# Altium PCB MK2.PcbDoc (part 6 of 7)
Units mil, origin at the board's own origin, x right, y up, seen from the top; angles counter-clockwise.
Board outline 3950 x 3965 mil, 2 copper layers (Top Layer, Bottom Layer); 19 components, 37 nets, 113 pads, 8 vias.
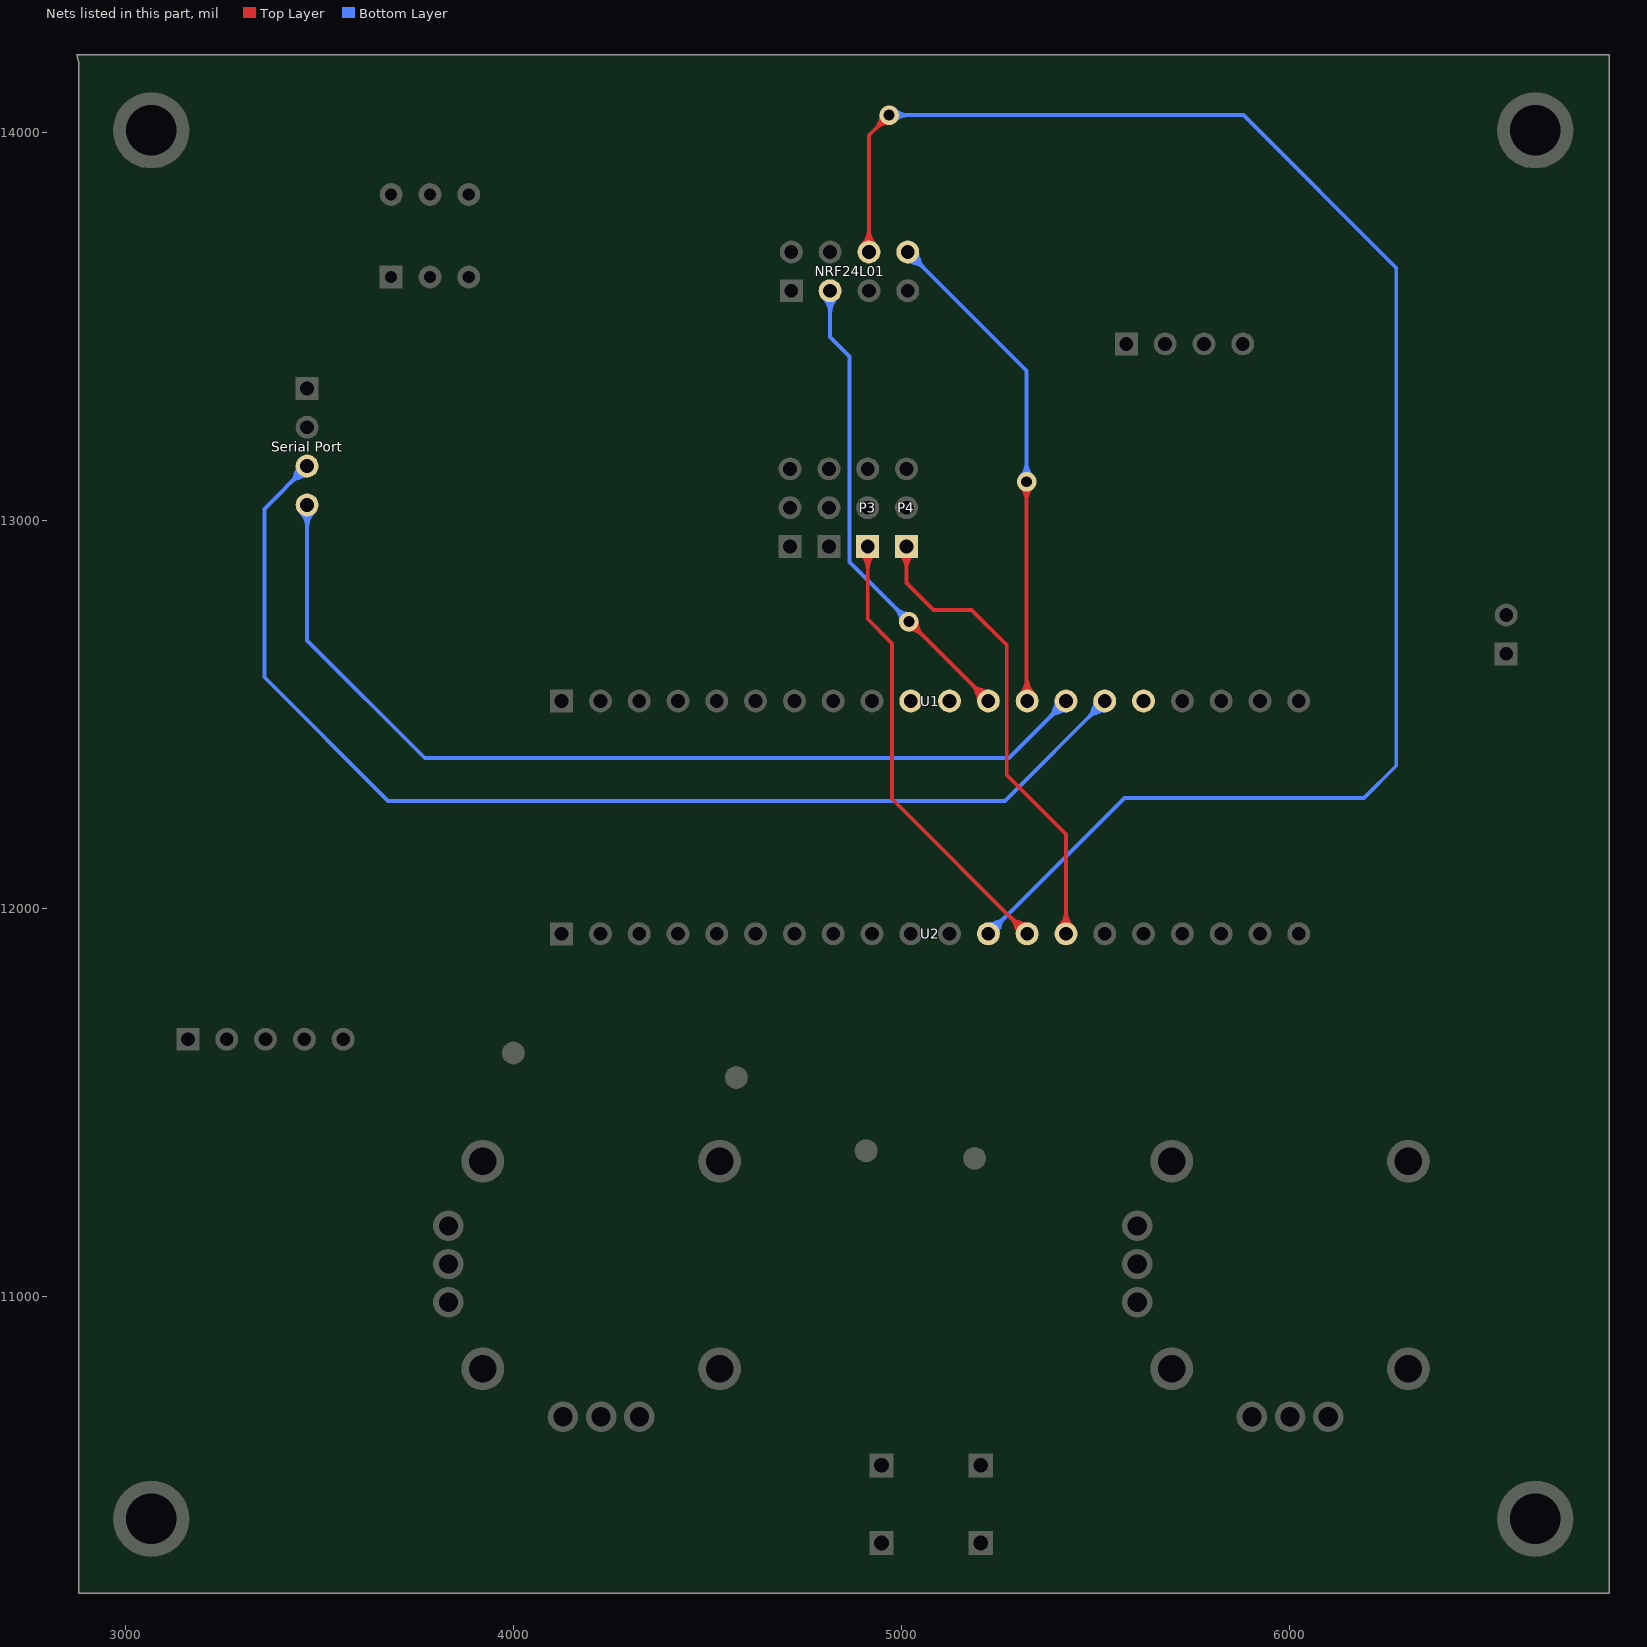
[diagram p6: the nets of this part, all layers, seen from the top]

## Via types
v1: diameter 50, hole 28, Top Layer to Bottom Layer, 8 vias

## Nets (pads, with @x,y where several pads share a name; then routed paths per layer and width w, separated by ;. In a path a pad name is that pad's centre, name@x,y a point inside that pad or via, vN(x,y) a via of type N, cw(c..) or ccw(c..) an arc to the next point about the centre after c; other vN are vias at no path point) (continued)
PA7: NRF24L01.6 U2.12 | length 9483.3
  Top Layer w10: NRF24L01.6@4916.57,13691.93 4916.57,13992.72 v1(4968.54,14044.69) ; NRF24L01.6@4899.23,13709.27 ccw(c4857.36,13751.14) 4916.57,13751.14 ; NRF24L01.6@4899.23,13709.27 ccw(c4857.36,13751.14) 4916.57,13751.14 ; NRF24L01.6@4899.23,13709.27 ccw(c4857.36,13751.14) 4916.57,13751.14 ; NRF24L01.6@4899.23,13709.27 ccw(c4857.36,13751.14) 4916.57,13751.14 ; NRF24L01.6@4899.23,13709.27 ccw(c4857.36,13751.14) 4916.57,13751.14 ; NRF24L01.6@4899.23,13709.27 ccw(c4857.36,13751.14) 4916.57,13751.14 ; NRF24L01.6@4906.3,13702.2 ccw(c4881.5,13727) 4916.57,13727 ; NRF24L01.6@4906.3,13702.2 ccw(c4881.5,13727) 4916.57,13727 ; NRF24L01.6@4906.3,13702.2 ccw(c4881.5,13727) 4916.57,13727 ; NRF24L01.6@4906.3,13702.2 ccw(c4881.5,13727) 4916.57,13727 ; NRF24L01.6@4906.3,13702.2 ccw(c4881.5,13727) 4916.57,13727 ; NRF24L01.6@4906.3,13702.2 ccw(c4881.5,13727) 4916.57,13727 ; 4916.57,13727 ccw(c4951.65,13727) NRF24L01.6@4926.85,13702.2 ; 4916.57,13727 ccw(c4951.65,13727) NRF24L01.6@4926.85,13702.2 ; 4916.57,13727 ccw(c4951.65,13727) NRF24L01.6@4926.85,13702.2 ; 4916.57,13727 ccw(c4951.65,13727) NRF24L01.6@4926.85,13702.2 ; 4916.57,13727 ccw(c4951.65,13727) NRF24L01.6@4926.85,13702.2 ; 4916.57,13727 ccw(c4951.65,13727) NRF24L01.6@4926.85,13702.2 ; 4916.57,13751.14 ccw(c4975.79,13751.14) NRF24L01.6@4933.92,13709.27 ; 4916.57,13751.14 ccw(c4975.79,13751.14) NRF24L01.6@4933.92,13709.27 ; 4916.57,13751.14 ccw(c4975.79,13751.14) NRF24L01.6@4933.92,13709.27 ; 4916.57,13751.14 ccw(c4975.79,13751.14) NRF24L01.6@4933.92,13709.27 ; 4916.57,13751.14 ccw(c4975.79,13751.14) NRF24L01.6@4933.92,13709.27 ; 4916.57,13751.14 ccw(c4975.79,13751.14) NRF24L01.6@4933.92,13709.27 ; 4934.4,14010.54 cw(c4968.54,13976.4) v1@4968.54,14024.69 ; 4934.4,14010.54 ccw(c4900.26,14044.69) v1@4948.54,14044.69 ; 4934.4,14010.54 ccw(c4900.26,14044.69) v1@4948.54,14044.69 ; 4934.4,14010.54 cw(c4968.54,13976.4) v1@4968.54,14024.69 ; 4934.4,14010.54 ccw(c4900.26,14044.69) v1@4948.54,14044.69 ; 4934.4,14010.54 cw(c4968.54,13976.4) v1@4968.54,14024.69 ; 4934.4,14010.54 ccw(c4900.26,14044.69) v1@4948.54,14044.69 ; 4934.4,14010.54 cw(c4968.54,13976.4) v1@4968.54,14024.69 ; 4934.4,14010.54 ccw(c4900.26,14044.69) v1@4948.54,14044.69 ; 4934.4,14010.54 cw(c4968.54,13976.4) v1@4968.54,14024.69 ; 4934.4,14010.54 ccw(c4900.26,14044.69) v1@4948.54,14044.69 ; 4934.4,14010.54 cw(c4968.54,13976.4) v1@4968.54,14024.69 ; 4941.79,14019.49 cw(c4975.56,14010.44) v1(4968.54,14044.69) ; 4941.79,14019.49 cw(c4975.56,14010.44) v1(4968.54,14044.69) ; 4941.79,14019.49 cw(c4975.56,14010.44) v1(4968.54,14044.69) ; 4941.79,14019.49 cw(c4975.56,14010.44) v1(4968.54,14044.69) ; 4941.79,14019.49 cw(c4975.56,14010.44) v1(4968.54,14044.69) ; 4941.79,14019.49 cw(c4975.56,14010.44) v1(4968.54,14044.69) ; 4941.79,14019.49 cw(c4975.56,14010.44) v1(4968.54,14044.69) ; 4941.79,14019.49 cw(c4975.56,14010.44) v1(4968.54,14044.69) ; 4941.79,14019.49 cw(c4975.56,14010.44) v1(4968.54,14044.69) ; 4941.79,14019.49 cw(c4975.56,14010.44) v1(4968.54,14044.69) ; 4941.79,14019.49 cw(c4975.56,14010.44) v1(4968.54,14044.69) ; 4941.79,14019.49 cw(c4975.56,14010.44) v1(4968.54,14044.69) ; 4941.79,14019.49 cw(c4975.56,14010.44) v1(4968.54,14044.69) ; 4941.79,14019.49 cw(c4975.56,14010.44) v1(4968.54,14044.69) ; 4941.79,14019.49 cw(c4975.56,14010.44) v1(4968.54,14044.69) ; 4943.35,14017.93 ccw(c4934.3,14051.7) v1(4968.54,14044.69) ; 4943.35,14017.93 ccw(c4934.3,14051.7) v1(4968.54,14044.69) ; 4943.35,14017.93 ccw(c4934.3,14051.7) v1(4968.54,14044.69) ; 4943.35,14017.93 ccw(c4934.3,14051.7) v1(4968.54,14044.69) ; 4943.35,14017.93 ccw(c4934.3,14051.7) v1(4968.54,14044.69) ; 4943.35,14017.93 ccw(c4934.3,14051.7) v1(4968.54,14044.69) ; 4943.35,14017.93 ccw(c4934.3,14051.7) v1(4968.54,14044.69) ; 4943.35,14017.93 ccw(c4934.3,14051.7) v1(4968.54,14044.69) ; 4943.35,14017.93 ccw(c4934.3,14051.7) v1(4968.54,14044.69) ; 4943.35,14017.93 ccw(c4934.3,14051.7) v1(4968.54,14044.69) ; 4943.35,14017.93 ccw(c4934.3,14051.7) v1(4968.54,14044.69) ; 4943.35,14017.93 ccw(c4934.3,14051.7) v1(4968.54,14044.69) ; 4943.35,14017.93 ccw(c4934.3,14051.7) v1(4968.54,14044.69) ; 4943.35,14017.93 ccw(c4934.3,14051.7) v1(4968.54,14044.69) ; 4943.35,14017.93 ccw(c4934.3,14051.7) v1(4968.54,14044.69)
  Bottom Layer w10: v1(4968.54,14044.69) 5881.93,14044.69 6275.63,13650.98 6275.63,12367.52 6192.95,12284.84 5574.84,12284.84 U2.12@5224.45,11934.45 ; v1@4982.69,14030.54 cw(c5016.83,13996.4) 5016.83,14044.69 ; v1@4982.69,14030.54 cw(c5016.83,13996.4) 5016.83,14044.69 ; v1@4982.69,14030.54 cw(c5016.83,13996.4) 5016.83,14044.69 ; v1@4982.69,14030.54 cw(c5016.83,13996.4) 5016.83,14044.69 ; v1@4982.69,14030.54 cw(c5016.83,13996.4) 5016.83,14044.69 ; v1@4982.69,14030.54 cw(c5016.83,13996.4) 5016.83,14044.69 ; v1@4982.69,14058.83 ccw(c5016.83,14092.97) 5016.83,14044.69 ; v1@4982.69,14058.83 ccw(c5016.83,14092.97) 5016.83,14044.69 ; v1@4982.69,14058.83 ccw(c5016.83,14092.97) 5016.83,14044.69 ; v1@4982.69,14058.83 ccw(c5016.83,14092.97) 5016.83,14044.69 ; v1@4982.69,14058.83 ccw(c5016.83,14092.97) 5016.83,14044.69 ; v1@4982.69,14058.83 ccw(c5016.83,14092.97) 5016.83,14044.69 ; U2.12@5219.09,11935.55 cw(c5256.74,11927.84) 5246.8,11964.96 ; U2.12@5219.09,11935.55 cw(c5256.74,11927.84) 5246.8,11964.96 ; U2.12@5219.09,11935.55 cw(c5256.74,11927.84) 5246.8,11964.96 ; U2.12@5219.09,11935.55 cw(c5256.74,11927.84) 5246.8,11964.96 ; U2.12@5219.09,11935.55 cw(c5256.74,11927.84) 5246.8,11964.96 ; U2.12@5219.09,11935.55 cw(c5256.74,11927.84) 5246.8,11964.96 ; U2.12@5219.09,11935.55 cw(c5256.74,11927.84) 5246.8,11964.96 ; U2.12@5219.09,11935.55 cw(c5256.74,11927.84) 5246.8,11964.96 ; U2.12@5219.09,11935.55 cw(c5256.74,11927.84) 5246.8,11964.96 ; U2.12@5219.09,11935.55 cw(c5256.74,11927.84) 5246.8,11964.96 ; U2.12@5219.09,11935.55 cw(c5256.74,11927.84) 5246.8,11964.96 ; U2.12@5219.09,11935.55 cw(c5256.74,11927.84) 5246.8,11964.96 ; U2.12@5219.09,11935.55 cw(c5256.74,11927.84) 5246.8,11964.96 ; U2.12@5219.09,11935.55 cw(c5256.74,11927.84) 5246.8,11964.96 ; U2.12@5219.09,11935.55 cw(c5256.74,11927.84) 5246.8,11964.96 ; U2.12@5224.45,11948.98 ccw(c5224.45,11984.05) 5249.25,11959.25 ; U2.12@5224.45,11948.98 ccw(c5224.45,11984.05) 5249.25,11959.25 ; U2.12@5224.45,11948.98 ccw(c5224.45,11984.05) 5249.25,11959.25 ; U2.12@5224.45,11948.98 ccw(c5224.45,11984.05) 5249.25,11959.25 ; U2.12@5224.45,11948.98 ccw(c5224.45,11984.05) 5249.25,11959.25 ; U2.12@5224.45,11948.98 ccw(c5224.45,11984.05) 5249.25,11959.25 ; U2.12@5224.45,11958.98 ccw(c5224.45,12018.19) 5266.32,11976.32 ; U2.12@5224.45,11958.98 ccw(c5224.45,12018.19) 5266.32,11976.32 ; U2.12@5224.45,11958.98 ccw(c5224.45,12018.19) 5266.32,11976.32 ; U2.12@5224.45,11958.98 ccw(c5224.45,12018.19) 5266.32,11976.32 ; U2.12@5224.45,11958.98 ccw(c5224.45,12018.19) 5266.32,11976.32 ; U2.12@5224.45,11958.98 ccw(c5224.45,12018.19) 5266.32,11976.32 ; U2.12@5225.55,11929.09 ccw(c5217.84,11966.75) 5254.96,11956.8 ; U2.12@5225.55,11929.09 ccw(c5217.84,11966.75) 5254.96,11956.8 ; U2.12@5225.55,11929.09 ccw(c5217.84,11966.75) 5254.96,11956.8 ; U2.12@5225.55,11929.09 ccw(c5217.84,11966.75) 5254.96,11956.8 ; U2.12@5225.55,11929.09 ccw(c5217.84,11966.75) 5254.96,11956.8 ; U2.12@5225.55,11929.09 ccw(c5217.84,11966.75) 5254.96,11956.8 ; U2.12@5225.55,11929.09 ccw(c5217.84,11966.75) 5254.96,11956.8 ; U2.12@5225.55,11929.09 ccw(c5217.84,11966.75) 5254.96,11956.8 ; U2.12@5225.55,11929.09 ccw(c5217.84,11966.75) 5254.96,11956.8 ; U2.12@5225.55,11929.09 ccw(c5217.84,11966.75) 5254.96,11956.8 ; U2.12@5225.55,11929.09 ccw(c5217.84,11966.75) 5254.96,11956.8 ; U2.12@5225.55,11929.09 ccw(c5217.84,11966.75) 5254.96,11956.8 ; U2.12@5225.55,11929.09 ccw(c5217.84,11966.75) 5254.96,11956.8 ; U2.12@5225.55,11929.09 ccw(c5217.84,11966.75) 5254.96,11956.8 ; U2.12@5225.55,11929.09 ccw(c5217.84,11966.75) 5254.96,11956.8 ; U2.12@5238.98,11934.45 cw(c5274.05,11934.45) 5249.25,11959.25 ; U2.12@5238.98,11934.45 cw(c5274.05,11934.45) 5249.25,11959.25 ; U2.12@5238.98,11934.45 cw(c5274.05,11934.45) 5249.25,11959.25 ; U2.12@5238.98,11934.45 cw(c5274.05,11934.45) 5249.25,11959.25 ; U2.12@5238.98,11934.45 cw(c5274.05,11934.45) 5249.25,11959.25 ; U2.12@5238.98,11934.45 cw(c5274.05,11934.45) 5249.25,11959.25 ; U2.12@5248.98,11934.45 cw(c5308.19,11934.45) 5266.32,11976.32 ; U2.12@5248.98,11934.45 cw(c5308.19,11934.45) 5266.32,11976.32 ; U2.12@5248.98,11934.45 cw(c5308.19,11934.45) 5266.32,11976.32 ; U2.12@5248.98,11934.45 cw(c5308.19,11934.45) 5266.32,11976.32 ; U2.12@5248.98,11934.45 cw(c5308.19,11934.45) 5266.32,11976.32 ; U2.12@5248.98,11934.45 cw(c5308.19,11934.45) 5266.32,11976.32
PA8: U1.16
PA9: "Serial Port.3" U1.15 | length 7325
  Bottom Layer w10: 3468.54,13139.96 3358.31,13029.72 3358.31,12595.87 3677.2,12276.97 5266.97,12276.97 U1.15@5524.45,12534.45 ; 3426.67,13098.09 cw(c3468.54,13056.22) 3468.54,13115.43 ; 3426.67,13098.09 ccw(c3384.8,13139.96) 3444.02,13139.96 ; 3426.67,13098.09 ccw(c3384.8,13139.96) 3444.02,13139.96 ; 3426.67,13098.09 cw(c3468.54,13056.22) 3468.54,13115.43 ; 3426.67,13098.09 ccw(c3384.8,13139.96) 3444.02,13139.96 ; 3426.67,13098.09 cw(c3468.54,13056.22) 3468.54,13115.43 ; 3426.67,13098.09 ccw(c3384.8,13139.96) 3444.02,13139.96 ; 3426.67,13098.09 cw(c3468.54,13056.22) 3468.54,13115.43 ; 3426.67,13098.09 ccw(c3384.8,13139.96) 3444.02,13139.96 ; 3426.67,13098.09 cw(c3468.54,13056.22) 3468.54,13115.43 ; 3426.67,13098.09 ccw(c3384.8,13139.96) 3444.02,13139.96 ; 3426.67,13098.09 cw(c3468.54,13056.22) 3468.54,13115.43 ; 3438.03,13117.61 cw(c3475.16,13107.66) 3467.45,13145.32 ; 3438.03,13117.61 cw(c3475.16,13107.66) 3467.45,13145.32 ; 3438.03,13117.61 cw(c3475.16,13107.66) 3467.45,13145.32 ; 3438.03,13117.61 cw(c3475.16,13107.66) 3467.45,13145.32 ; 3438.03,13117.61 cw(c3475.16,13107.66) 3467.45,13145.32 ; 3438.03,13117.61 cw(c3475.16,13107.66) 3467.45,13145.32 ; 3438.03,13117.61 cw(c3475.16,13107.66) 3467.45,13145.32 ; 3438.03,13117.61 cw(c3475.16,13107.66) 3467.45,13145.32 ; 3438.03,13117.61 cw(c3475.16,13107.66) 3467.45,13145.32 ; 3438.03,13117.61 cw(c3475.16,13107.66) 3467.45,13145.32 ; 3438.03,13117.61 cw(c3475.16,13107.66) 3467.45,13145.32 ; 3438.03,13117.61 cw(c3475.16,13107.66) 3467.45,13145.32 ; 3438.03,13117.61 cw(c3475.16,13107.66) 3467.45,13145.32 ; 3438.03,13117.61 cw(c3475.16,13107.66) 3467.45,13145.32 ; 3438.03,13117.61 cw(c3475.16,13107.66) 3467.45,13145.32 ; 3443.74,13115.16 cw(c3468.54,13090.36) 3468.54,13125.43 ; 3443.74,13115.16 ccw(c3418.94,13139.96) 3454.02,13139.96 ; 3443.74,13115.16 ccw(c3418.94,13139.96) 3454.02,13139.96 ; 3443.74,13115.16 cw(c3468.54,13090.36) 3468.54,13125.43 ; 3443.74,13115.16 ccw(c3418.94,13139.96) 3454.02,13139.96 ; 3443.74,13115.16 cw(c3468.54,13090.36) 3468.54,13125.43 ; 3443.74,13115.16 ccw(c3418.94,13139.96) 3454.02,13139.96 ; 3443.74,13115.16 cw(c3468.54,13090.36) 3468.54,13125.43 ; 3443.74,13115.16 ccw(c3418.94,13139.96) 3454.02,13139.96 ; 3443.74,13115.16 cw(c3468.54,13090.36) 3468.54,13125.43 ; 3443.74,13115.16 ccw(c3418.94,13139.96) 3454.02,13139.96 ; 3443.74,13115.16 cw(c3468.54,13090.36) 3468.54,13125.43 ; 3446.2,13109.45 ccw(c3436.25,13146.57) 3473.9,13138.86 ; 3446.2,13109.45 ccw(c3436.25,13146.57) 3473.9,13138.86 ; 3446.2,13109.45 ccw(c3436.25,13146.57) 3473.9,13138.86 ; 3446.2,13109.45 ccw(c3436.25,13146.57) 3473.9,13138.86 ; 3446.2,13109.45 ccw(c3436.25,13146.57) 3473.9,13138.86 ; 3446.2,13109.45 ccw(c3436.25,13146.57) 3473.9,13138.86 ; 3446.2,13109.45 ccw(c3436.25,13146.57) 3473.9,13138.86 ; 3446.2,13109.45 ccw(c3436.25,13146.57) 3473.9,13138.86 ; 3446.2,13109.45 ccw(c3436.25,13146.57) 3473.9,13138.86 ; 3446.2,13109.45 ccw(c3436.25,13146.57) 3473.9,13138.86 ; 3446.2,13109.45 ccw(c3436.25,13146.57) 3473.9,13138.86 ; 3446.2,13109.45 ccw(c3436.25,13146.57) 3473.9,13138.86 ; 3446.2,13109.45 ccw(c3436.25,13146.57) 3473.9,13138.86 ; 3446.2,13109.45 ccw(c3436.25,13146.57) 3473.9,13138.86 ; 3446.2,13109.45 ccw(c3436.25,13146.57) 3473.9,13138.86 ; 5482.58,12492.58 cw(c5524.45,12450.71) U1.15@5524.45,12509.92 ; 5482.58,12492.58 ccw(c5440.71,12534.45) U1.15@5499.92,12534.45 ; 5482.58,12492.58 ccw(c5440.71,12534.45) U1.15@5499.92,12534.45 ; 5482.58,12492.58 cw(c5524.45,12450.71) U1.15@5524.45,12509.92 ; 5482.58,12492.58 ccw(c5440.71,12534.45) U1.15@5499.92,12534.45 ; 5482.58,12492.58 cw(c5524.45,12450.71) U1.15@5524.45,12509.92 ; 5482.58,12492.58 ccw(c5440.71,12534.45) U1.15@5499.92,12534.45 ; 5482.58,12492.58 cw(c5524.45,12450.71) U1.15@5524.45,12509.92 ; 5482.58,12492.58 ccw(c5440.71,12534.45) U1.15@5499.92,12534.45 ; 5482.58,12492.58 cw(c5524.45,12450.71) U1.15@5524.45,12509.92 ; 5482.58,12492.58 ccw(c5440.71,12534.45) U1.15@5499.92,12534.45 ; 5482.58,12492.58 cw(c5524.45,12450.71) U1.15@5524.45,12509.92 ; 5493.93,12512.1 cw(c5531.06,12502.15) U1.15@5523.35,12539.81 ; 5493.93,12512.1 cw(c5531.06,12502.15) U1.15@5523.35,12539.81 ; 5493.93,12512.1 cw(c5531.06,12502.15) U1.15@5523.35,12539.81 ; 5493.93,12512.1 cw(c5531.06,12502.15) U1.15@5523.35,12539.81 ; 5493.93,12512.1 cw(c5531.06,12502.15) U1.15@5523.35,12539.81 ; 5493.93,12512.1 cw(c5531.06,12502.15) U1.15@5523.35,12539.81 ; 5493.93,12512.1 cw(c5531.06,12502.15) U1.15@5523.35,12539.81 ; 5493.93,12512.1 cw(c5531.06,12502.15) U1.15@5523.35,12539.81 ; 5493.93,12512.1 cw(c5531.06,12502.15) U1.15@5523.35,12539.81 ; 5493.93,12512.1 cw(c5531.06,12502.15) U1.15@5523.35,12539.81 ; 5493.93,12512.1 cw(c5531.06,12502.15) U1.15@5523.35,12539.81 ; 5493.93,12512.1 cw(c5531.06,12502.15) U1.15@5523.35,12539.81 ; 5493.93,12512.1 cw(c5531.06,12502.15) U1.15@5523.35,12539.81 ; 5493.93,12512.1 cw(c5531.06,12502.15) U1.15@5523.35,12539.81 ; 5493.93,12512.1 cw(c5531.06,12502.15) U1.15@5523.35,12539.81 ; 5499.65,12509.65 cw(c5524.45,12484.85) U1.15@5524.45,12519.92 ; 5499.65,12509.65 ccw(c5474.85,12534.45) U1.15@5509.92,12534.45 ; 5499.65,12509.65 ccw(c5474.85,12534.45) U1.15@5509.92,12534.45 ; 5499.65,12509.65 cw(c5524.45,12484.85) U1.15@5524.45,12519.92 ; 5499.65,12509.65 ccw(c5474.85,12534.45) U1.15@5509.92,12534.45 ; 5499.65,12509.65 cw(c5524.45,12484.85) U1.15@5524.45,12519.92 ; 5499.65,12509.65 ccw(c5474.85,12534.45) U1.15@5509.92,12534.45 ; 5499.65,12509.65 cw(c5524.45,12484.85) U1.15@5524.45,12519.92 ; 5499.65,12509.65 ccw(c5474.85,12534.45) U1.15@5509.92,12534.45 ; 5499.65,12509.65 cw(c5524.45,12484.85) U1.15@5524.45,12519.92 ; 5499.65,12509.65 ccw(c5474.85,12534.45) U1.15@5509.92,12534.45 ; 5499.65,12509.65 cw(c5524.45,12484.85) U1.15@5524.45,12519.92 ; 5502.1,12503.93 ccw(c5492.15,12541.06) U1.15@5529.81,12533.35 ; 5502.1,12503.93 ccw(c5492.15,12541.06) U1.15@5529.81,12533.35 ; 5502.1,12503.93 ccw(c5492.15,12541.06) U1.15@5529.81,12533.35 ; 5502.1,12503.93 ccw(c5492.15,12541.06) U1.15@5529.81,12533.35 ; 5502.1,12503.93 ccw(c5492.15,12541.06) U1.15@5529.81,12533.35 ; 5502.1,12503.93 ccw(c5492.15,12541.06) U1.15@5529.81,12533.35 ; 5502.1,12503.93 ccw(c5492.15,12541.06) U1.15@5529.81,12533.35 ; 5502.1,12503.93 ccw(c5492.15,12541.06) U1.15@5529.81,12533.35 ; 5502.1,12503.93 ccw(c5492.15,12541.06) U1.15@5529.81,12533.35 ; 5502.1,12503.93 ccw(c5492.15,12541.06) U1.15@5529.81,12533.35 ; 5502.1,12503.93 ccw(c5492.15,12541.06) U1.15@5529.81,12533.35 ; 5502.1,12503.93 ccw(c5492.15,12541.06) U1.15@5529.81,12533.35 ; 5502.1,12503.93 ccw(c5492.15,12541.06) U1.15@5529.81,12533.35 ; 5502.1,12503.93 ccw(c5492.15,12541.06) U1.15@5529.81,12533.35 ; 5502.1,12503.93 ccw(c5492.15,12541.06) U1.15@5529.81,12533.35
PA10: "Serial Port.4" U1.14 | length 5545.9
  Bottom Layer w10: 3468.54,13039.96 3468.54,12690.35 3771.69,12387.2 5277.2,12387.2 U1.14@5424.45,12534.45 ; 3451.2,13022.62 cw(c3409.33,12980.75) 3468.54,12980.75 ; 3451.2,13022.62 cw(c3409.33,12980.75) 3468.54,12980.75 ; 3451.2,13022.62 cw(c3409.33,12980.75) 3468.54,12980.75 ; 3451.2,13022.62 cw(c3409.33,12980.75) 3468.54,12980.75 ; 3451.2,13022.62 cw(c3409.33,12980.75) 3468.54,12980.75 ; 3451.2,13022.62 cw(c3409.33,12980.75) 3468.54,12980.75 ; 3458.27,13029.69 cw(c3433.47,13004.89) 3468.54,13004.89 ; 3458.27,13029.69 cw(c3433.47,13004.89) 3468.54,13004.89 ; 3458.27,13029.69 cw(c3433.47,13004.89) 3468.54,13004.89 ; 3458.27,13029.69 cw(c3433.47,13004.89) 3468.54,13004.89 ; 3458.27,13029.69 cw(c3433.47,13004.89) 3468.54,13004.89 ; 3458.27,13029.69 cw(c3433.47,13004.89) 3468.54,13004.89 ; 3468.54,12980.75 cw(c3527.76,12980.75) 3485.89,13022.62 ; 3468.54,12980.75 cw(c3527.76,12980.75) 3485.89,13022.62 ; 3468.54,12980.75 cw(c3527.76,12980.75) 3485.89,13022.62 ; 3468.54,12980.75 cw(c3527.76,12980.75) 3485.89,13022.62 ; 3468.54,12980.75 cw(c3527.76,12980.75) 3485.89,13022.62 ; 3468.54,12980.75 cw(c3527.76,12980.75) 3485.89,13022.62 ; 3468.54,13004.89 cw(c3503.62,13004.89) 3478.82,13029.69 ; 3468.54,13004.89 cw(c3503.62,13004.89) 3478.82,13029.69 ; 3468.54,13004.89 cw(c3503.62,13004.89) 3478.82,13029.69 ; 3468.54,13004.89 cw(c3503.62,13004.89) 3478.82,13029.69 ; 3468.54,13004.89 cw(c3503.62,13004.89) 3478.82,13029.69 ; 3468.54,13004.89 cw(c3503.62,13004.89) 3478.82,13029.69 ; 5382.58,12492.58 cw(c5424.45,12450.71) U1.14@5424.45,12509.92 ; 5382.58,12492.58 ccw(c5340.71,12534.45) U1.14@5399.92,12534.45 ; 5382.58,12492.58 ccw(c5340.71,12534.45) U1.14@5399.92,12534.45 ; 5382.58,12492.58 cw(c5424.45,12450.71) U1.14@5424.45,12509.92 ; 5382.58,12492.58 ccw(c5340.71,12534.45) U1.14@5399.92,12534.45 ; 5382.58,12492.58 cw(c5424.45,12450.71) U1.14@5424.45,12509.92 ; 5382.58,12492.58 ccw(c5340.71,12534.45) U1.14@5399.92,12534.45 ; 5382.58,12492.58 cw(c5424.45,12450.71) U1.14@5424.45,12509.92 ; 5382.58,12492.58 ccw(c5340.71,12534.45) U1.14@5399.92,12534.45 ; 5382.58,12492.58 cw(c5424.45,12450.71) U1.14@5424.45,12509.92 ; 5382.58,12492.58 ccw(c5340.71,12534.45) U1.14@5399.92,12534.45 ; 5382.58,12492.58 cw(c5424.45,12450.71) U1.14@5424.45,12509.92 ; 5393.93,12512.1 cw(c5431.06,12502.15) U1.14@5423.35,12539.81 ; 5393.93,12512.1 cw(c5431.06,12502.15) U1.14@5423.35,12539.81 ; 5393.93,12512.1 cw(c5431.06,12502.15) U1.14@5423.35,12539.81 ; 5393.93,12512.1 cw(c5431.06,12502.15) U1.14@5423.35,12539.81 ; 5393.93,12512.1 cw(c5431.06,12502.15) U1.14@5423.35,12539.81 ; 5393.93,12512.1 cw(c5431.06,12502.15) U1.14@5423.35,12539.81 ; 5393.93,12512.1 cw(c5431.06,12502.15) U1.14@5423.35,12539.81 ; 5393.93,12512.1 cw(c5431.06,12502.15) U1.14@5423.35,12539.81 ; 5393.93,12512.1 cw(c5431.06,12502.15) U1.14@5423.35,12539.81 ; 5393.93,12512.1 cw(c5431.06,12502.15) U1.14@5423.35,12539.81 ; 5393.93,12512.1 cw(c5431.06,12502.15) U1.14@5423.35,12539.81 ; 5393.93,12512.1 cw(c5431.06,12502.15) U1.14@5423.35,12539.81 ; 5393.93,12512.1 cw(c5431.06,12502.15) U1.14@5423.35,12539.81 ; 5393.93,12512.1 cw(c5431.06,12502.15) U1.14@5423.35,12539.81 ; 5393.93,12512.1 cw(c5431.06,12502.15) U1.14@5423.35,12539.81 ; 5399.65,12509.65 cw(c5424.45,12484.85) U1.14@5424.45,12519.92 ; 5399.65,12509.65 ccw(c5374.85,12534.45) U1.14@5409.92,12534.45 ; 5399.65,12509.65 ccw(c5374.85,12534.45) U1.14@5409.92,12534.45 ; 5399.65,12509.65 cw(c5424.45,12484.85) U1.14@5424.45,12519.92 ; 5399.65,12509.65 ccw(c5374.85,12534.45) U1.14@5409.92,12534.45 ; 5399.65,12509.65 cw(c5424.45,12484.85) U1.14@5424.45,12519.92 ; 5399.65,12509.65 ccw(c5374.85,12534.45) U1.14@5409.92,12534.45 ; 5399.65,12509.65 cw(c5424.45,12484.85) U1.14@5424.45,12519.92 ; 5399.65,12509.65 ccw(c5374.85,12534.45) U1.14@5409.92,12534.45 ; 5399.65,12509.65 cw(c5424.45,12484.85) U1.14@5424.45,12519.92 ; 5399.65,12509.65 ccw(c5374.85,12534.45) U1.14@5409.92,12534.45 ; 5399.65,12509.65 cw(c5424.45,12484.85) U1.14@5424.45,12519.92 ; 5402.1,12503.93 ccw(c5392.15,12541.06) U1.14@5429.81,12533.35 ; 5402.1,12503.93 ccw(c5392.15,12541.06) U1.14@5429.81,12533.35 ; 5402.1,12503.93 ccw(c5392.15,12541.06) U1.14@5429.81,12533.35 ; 5402.1,12503.93 ccw(c5392.15,12541.06) U1.14@5429.81,12533.35 ; 5402.1,12503.93 ccw(c5392.15,12541.06) U1.14@5429.81,12533.35 ; 5402.1,12503.93 ccw(c5392.15,12541.06) U1.14@5429.81,12533.35 ; 5402.1,12503.93 ccw(c5392.15,12541.06) U1.14@5429.81,12533.35 ; 5402.1,12503.93 ccw(c5392.15,12541.06) U1.14@5429.81,12533.35 ; 5402.1,12503.93 ccw(c5392.15,12541.06) U1.14@5429.81,12533.35 ; 5402.1,12503.93 ccw(c5392.15,12541.06) U1.14@5429.81,12533.35 ; 5402.1,12503.93 ccw(c5392.15,12541.06) U1.14@5429.81,12533.35 ; 5402.1,12503.93 ccw(c5392.15,12541.06) U1.14@5429.81,12533.35 ; 5402.1,12503.93 ccw(c5392.15,12541.06) U1.14@5429.81,12533.35 ; 5402.1,12503.93 ccw(c5392.15,12541.06) U1.14@5429.81,12533.35 ; 5402.1,12503.93 ccw(c5392.15,12541.06) U1.14@5429.81,12533.35
PA11: NRF24L01.8 U1.13 | length 5249
  Top Layer w10: v1(5322.87,13099.8) 5322.87,12536.02 U1.13@5324.45,12534.45 ; U1.13@5307.11,12551.79 ccw(c5269.04,12589.86) 5322.87,12589.86 ; U1.13@5307.11,12551.79 ccw(c5269.04,12589.86) 5322.87,12589.86 ; U1.13@5307.11,12551.79 ccw(c5269.04,12589.86) 5322.87,12589.86 ; U1.13@5307.11,12551.79 ccw(c5269.04,12589.86) 5322.87,12589.86 ; U1.13@5307.11,12551.79 ccw(c5269.04,12589.86) 5322.87,12589.86 ; U1.13@5307.11,12551.79 ccw(c5269.04,12589.86) 5322.87,12589.86 ; v1@5308.73,13085.66 cw(c5274.59,13051.52) 5322.87,13051.52 ; v1@5308.73,13085.66 cw(c5274.59,13051.52) 5322.87,13051.52 ; v1@5308.73,13085.66 cw(c5274.59,13051.52) 5322.87,13051.52 ; v1@5308.73,13085.66 cw(c5274.59,13051.52) 5322.87,13051.52 ; v1@5308.73,13085.66 cw(c5274.59,13051.52) 5322.87,13051.52 ; v1@5308.73,13085.66 cw(c5274.59,13051.52) 5322.87,13051.52 ; U1.13@5314.18,12544.72 ccw(c5293.18,12565.72) 5322.87,12565.72 ; U1.13@5314.18,12544.72 ccw(c5293.18,12565.72) 5322.87,12565.72 ; U1.13@5314.18,12544.72 ccw(c5293.18,12565.72) 5322.87,12565.72 ; U1.13@5314.18,12544.72 ccw(c5293.18,12565.72) 5322.87,12565.72 ; U1.13@5314.18,12544.72 ccw(c5293.18,12565.72) 5322.87,12565.72 ; U1.13@5314.18,12544.72 ccw(c5293.18,12565.72) 5322.87,12565.72 ; 5322.87,12573.32 ccw(c5363.32,12573.32) U1.13@5334.72,12544.72 ; 5322.87,12573.32 ccw(c5363.32,12573.32) U1.13@5334.72,12544.72 ; 5322.87,12573.32 ccw(c5363.32,12573.32) U1.13@5334.72,12544.72 ; 5322.87,12573.32 ccw(c5363.32,12573.32) U1.13@5334.72,12544.72 ; 5322.87,12573.32 ccw(c5363.32,12573.32) U1.13@5334.72,12544.72 ; 5322.87,12573.32 ccw(c5363.32,12573.32) U1.13@5334.72,12544.72 ; 5322.87,12597.46 ccw(c5387.46,12597.46) U1.13@5341.79,12551.79 ; 5322.87,12597.46 ccw(c5387.46,12597.46) U1.13@5341.79,12551.79 ; 5322.87,12597.46 ccw(c5387.46,12597.46) U1.13@5341.79,12551.79 ; 5322.87,12597.46 ccw(c5387.46,12597.46) U1.13@5341.79,12551.79 ; 5322.87,12597.46 ccw(c5387.46,12597.46) U1.13@5341.79,12551.79 ; 5322.87,12597.46 ccw(c5387.46,12597.46) U1.13@5341.79,12551.79 ; 5322.87,13051.52 cw(c5371.16,13051.52) v1@5337.02,13085.66 ; 5322.87,13051.52 cw(c5371.16,13051.52) v1@5337.02,13085.66 ; 5322.87,13051.52 cw(c5371.16,13051.52) v1@5337.02,13085.66 ; 5322.87,13051.52 cw(c5371.16,13051.52) v1@5337.02,13085.66 ; 5322.87,13051.52 cw(c5371.16,13051.52) v1@5337.02,13085.66 ; 5322.87,13051.52 cw(c5371.16,13051.52) v1@5337.02,13085.66
  Bottom Layer w10: NRF24L01.8@5016.57,13691.93 5322.87,13385.63 v1(5322.87,13099.8) ; NRF24L01.8@5011.21,13690.83 ccw(c5048.87,13698.54) 5038.92,13661.41 ; NRF24L01.8@5011.21,13690.83 ccw(c5048.87,13698.54) 5038.92,13661.41 ; NRF24L01.8@5011.21,13690.83 ccw(c5048.87,13698.54) 5038.92,13661.41 ; NRF24L01.8@5011.21,13690.83 ccw(c5048.87,13698.54) 5038.92,13661.41 ; NRF24L01.8@5011.21,13690.83 ccw(c5048.87,13698.54) 5038.92,13661.41 ; NRF24L01.8@5011.21,13690.83 ccw(c5048.87,13698.54) 5038.92,13661.41 ; NRF24L01.8@5011.21,13690.83 ccw(c5048.87,13698.54) 5038.92,13661.41 ; NRF24L01.8@5011.21,13690.83 ccw(c5048.87,13698.54) 5038.92,13661.41 ; NRF24L01.8@5011.21,13690.83 ccw(c5048.87,13698.54) 5038.92,13661.41 ; NRF24L01.8@5011.21,13690.83 ccw(c5048.87,13698.54) 5038.92,13661.41 ; NRF24L01.8@5011.21,13690.83 ccw(c5048.87,13698.54) 5038.92,13661.41 ; NRF24L01.8@5011.21,13690.83 ccw(c5048.87,13698.54) 5038.92,13661.41 ; NRF24L01.8@5011.21,13690.83 ccw(c5048.87,13698.54) 5038.92,13661.41 ; NRF24L01.8@5011.21,13690.83 ccw(c5048.87,13698.54) 5038.92,13661.41 ; NRF24L01.8@5011.21,13690.83 ccw(c5048.87,13698.54) 5038.92,13661.41 ; NRF24L01.8@5016.57,13667.4 cw(c5016.57,13608.19) 5058.45,13650.06 ; NRF24L01.8@5016.57,13667.4 cw(c5016.57,13608.19) 5058.45,13650.06 ; NRF24L01.8@5016.57,13667.4 cw(c5016.57,13608.19) 5058.45,13650.06 ; NRF24L01.8@5016.57,13667.4 cw(c5016.57,13608.19) 5058.45,13650.06 ; NRF24L01.8@5016.57,13667.4 cw(c5016.57,13608.19) 5058.45,13650.06 ; NRF24L01.8@5016.57,13667.4 cw(c5016.57,13608.19) 5058.45,13650.06 ; NRF24L01.8@5016.57,13677.4 cw(c5016.57,13642.33) 5041.37,13667.13 ; NRF24L01.8@5016.57,13677.4 cw(c5016.57,13642.33) 5041.37,13667.13 ; NRF24L01.8@5016.57,13677.4 cw(c5016.57,13642.33) 5041.37,13667.13 ; NRF24L01.8@5016.57,13677.4 cw(c5016.57,13642.33) 5041.37,13667.13 ; NRF24L01.8@5016.57,13677.4 cw(c5016.57,13642.33) 5041.37,13667.13 ; NRF24L01.8@5016.57,13677.4 cw(c5016.57,13642.33) 5041.37,13667.13 ; NRF24L01.8@5017.67,13697.29 cw(c5009.96,13659.63) 5047.09,13669.58 ; NRF24L01.8@5017.67,13697.29 cw(c5009.96,13659.63) 5047.09,13669.58 ; NRF24L01.8@5017.67,13697.29 cw(c5009.96,13659.63) 5047.09,13669.58 ; NRF24L01.8@5017.67,13697.29 cw(c5009.96,13659.63) 5047.09,13669.58 ; NRF24L01.8@5017.67,13697.29 cw(c5009.96,13659.63) 5047.09,13669.58 ; NRF24L01.8@5017.67,13697.29 cw(c5009.96,13659.63) 5047.09,13669.58 ; NRF24L01.8@5017.67,13697.29 cw(c5009.96,13659.63) 5047.09,13669.58 ; NRF24L01.8@5017.67,13697.29 cw(c5009.96,13659.63) 5047.09,13669.58 ; NRF24L01.8@5017.67,13697.29 cw(c5009.96,13659.63) 5047.09,13669.58 ; NRF24L01.8@5017.67,13697.29 cw(c5009.96,13659.63) 5047.09,13669.58 ; NRF24L01.8@5017.67,13697.29 cw(c5009.96,13659.63) 5047.09,13669.58 ; NRF24L01.8@5017.67,13697.29 cw(c5009.96,13659.63) 5047.09,13669.58 ; NRF24L01.8@5017.67,13697.29 cw(c5009.96,13659.63) 5047.09,13669.58 ; NRF24L01.8@5017.67,13697.29 cw(c5009.96,13659.63) 5047.09,13669.58 ; NRF24L01.8@5017.67,13697.29 cw(c5009.96,13659.63) 5047.09,13669.58 ; NRF24L01.8@5031.1,13691.93 ccw(c5066.17,13691.93) 5041.37,13667.13 ; NRF24L01.8@5031.1,13691.93 ccw(c5066.17,13691.93) 5041.37,13667.13 ; NRF24L01.8@5031.1,13691.93 ccw(c5066.17,13691.93) 5041.37,13667.13 ; NRF24L01.8@5031.1,13691.93 ccw(c5066.17,13691.93) 5041.37,13667.13 ; NRF24L01.8@5031.1,13691.93 ccw(c5066.17,13691.93) 5041.37,13667.13 ; NRF24L01.8@5031.1,13691.93 ccw(c5066.17,13691.93) 5041.37,13667.13 ; NRF24L01.8@5041.1,13691.93 ccw(c5100.32,13691.93) 5058.45,13650.06 ; NRF24L01.8@5041.1,13691.93 ccw(c5100.32,13691.93) 5058.45,13650.06 ; NRF24L01.8@5041.1,13691.93 ccw(c5100.32,13691.93) 5058.45,13650.06 ; NRF24L01.8@5041.1,13691.93 ccw(c5100.32,13691.93) 5058.45,13650.06 ; NRF24L01.8@5041.1,13691.93 ccw(c5100.32,13691.93) 5058.45,13650.06 ; NRF24L01.8@5041.1,13691.93 ccw(c5100.32,13691.93) 5058.45,13650.06 ; v1@5308.73,13113.95 ccw(c5274.59,13148.09) 5322.87,13148.09 ; v1@5308.73,13113.95 ccw(c5274.59,13148.09) 5322.87,13148.09 ; v1@5308.73,13113.95 ccw(c5274.59,13148.09) 5322.87,13148.09 ; v1@5308.73,13113.95 ccw(c5274.59,13148.09) 5322.87,13148.09 ; v1@5308.73,13113.95 ccw(c5274.59,13148.09) 5322.87,13148.09 ; v1@5308.73,13113.95 ccw(c5274.59,13148.09) 5322.87,13148.09 ; 5322.87,13148.09 ccw(c5371.16,13148.09) v1@5337.02,13113.95 ; 5322.87,13148.09 ccw(c5371.16,13148.09) v1@5337.02,13113.95 ; 5322.87,13148.09 ccw(c5371.16,13148.09) v1@5337.02,13113.95 ; 5322.87,13148.09 ccw(c5371.16,13148.09) v1@5337.02,13113.95 ; 5322.87,13148.09 ccw(c5371.16,13148.09) v1@5337.02,13113.95 ; 5322.87,13148.09 ccw(c5371.16,13148.09) v1@5337.02,13113.95
PA12: NRF24L01.3 U1.12 | length 7512.2
  Top Layer w10: U1.12@5224.45,12534.45 v1(5019.72,12739.17) ; v1@5019.72,12719.17 cw(c5019.72,12670.89) 5053.87,12705.03 ; v1@5019.72,12719.17 cw(c5019.72,12670.89) 5053.87,12705.03 ; v1@5019.72,12719.17 cw(c5019.72,12670.89) 5053.87,12705.03 ; v1@5019.72,12719.17 cw(c5019.72,12670.89) 5053.87,12705.03 ; v1@5019.72,12719.17 cw(c5019.72,12670.89) 5053.87,12705.03 ; v1@5019.72,12719.17 cw(c5019.72,12670.89) 5053.87,12705.03 ; v1(5019.72,12739.17) ccw(c5053.97,12746.19) 5044.92,12712.42 ; v1(5019.72,12739.17) cw(c5012.71,12704.93) 5046.48,12713.98 ; v1(5019.72,12739.17) ccw(c5053.97,12746.19) 5044.92,12712.42 ; v1(5019.72,12739.17) cw(c5012.71,12704.93) 5046.48,12713.98 ; v1(5019.72,12739.17) ccw(c5053.97,12746.19) 5044.92,12712.42 ; v1(5019.72,12739.17) cw(c5012.71,12704.93) 5046.48,12713.98 ; v1(5019.72,12739.17) ccw(c5053.97,12746.19) 5044.92,12712.42 ; v1(5019.72,12739.17) cw(c5012.71,12704.93) 5046.48,12713.98 ; v1(5019.72,12739.17) ccw(c5053.97,12746.19) 5044.92,12712.42 ; v1(5019.72,12739.17) cw(c5012.71,12704.93) 5046.48,12713.98 ; v1(5019.72,12739.17) cw(c5012.71,12704.93) 5046.48,12713.98 ; v1(5019.72,12739.17) ccw(c5053.97,12746.19) 5044.92,12712.42 ; v1(5019.72,12739.17) cw(c5012.71,12704.93) 5046.48,12713.98 ; v1(5019.72,12739.17) cw(c5012.71,12704.93) 5046.48,12713.98 ; v1(5019.72,12739.17) ccw(c5053.97,12746.19) 5044.92,12712.42 ; v1(5019.72,12739.17) ccw(c5053.97,12746.19) 5044.92,12712.42 ; v1(5019.72,12739.17) cw(c5012.71,12704.93) 5046.48,12713.98 ; v1(5019.72,12739.17) cw(c5012.71,12704.93) 5046.48,12713.98 ; v1(5019.72,12739.17) cw(c5012.71,12704.93) 5046.48,12713.98 ; v1(5019.72,12739.17) ccw(c5053.97,12746.19) 5044.92,12712.42 ; v1(5019.72,12739.17) ccw(c5053.97,12746.19) 5044.92,12712.42 ; v1(5019.72,12739.17) ccw(c5053.97,12746.19) 5044.92,12712.42 ; v1(5019.72,12739.17) cw(c5012.71,12704.93) 5046.48,12713.98 ; v1(5019.72,12739.17) cw(c5012.71,12704.93) 5046.48,12713.98 ; v1(5019.72,12739.17) cw(c5012.71,12704.93) 5046.48,12713.98 ; v1(5019.72,12739.17) cw(c5012.71,12704.93) 5046.48,12713.98 ; v1(5019.72,12739.17) ccw(c5053.97,12746.19) 5044.92,12712.42 ; v1(5019.72,12739.17) ccw(c5053.97,12746.19) 5044.92,12712.42 ; v1(5019.72,12739.17) ccw(c5053.97,12746.19) 5044.92,12712.42 ; v1(5019.72,12739.17) ccw(c5053.97,12746.19) 5044.92,12712.42 ; v1@5039.72,12739.17 ccw(c5088.01,12739.17) 5053.87,12705.03 ; v1@5039.72,12739.17 ccw(c5088.01,12739.17) 5053.87,12705.03 ; v1@5039.72,12739.17 ccw(c5088.01,12739.17) 5053.87,12705.03 ; v1@5039.72,12739.17 ccw(c5088.01,12739.17) 5053.87,12705.03 ; v1@5039.72,12739.17 ccw(c5088.01,12739.17) 5053.87,12705.03 ; v1@5039.72,12739.17 ccw(c5088.01,12739.17) 5053.87,12705.03 ; 5182.58,12576.32 cw(c5140.71,12534.45) U1.12@5199.92,12534.45 ; 5182.58,12576.32 ccw(c5224.45,12618.19) U1.12@5224.45,12558.98 ; 5182.58,12576.32 ccw(c5224.45,12618.19) U1.12@5224.45,12558.98 ; 5182.58,12576.32 cw(c5140.71,12534.45) U1.12@5199.92,12534.45 ; 5182.58,12576.32 ccw(c5224.45,12618.19) U1.12@5224.45,12558.98 ; 5182.58,12576.32 cw(c5140.71,12534.45) U1.12@5199.92,12534.45 ; 5182.58,12576.32 ccw(c5224.45,12618.19) U1.12@5224.45,12558.98 ; 5182.58,12576.32 cw(c5140.71,12534.45) U1.12@5199.92,12534.45 ; 5182.58,12576.32 ccw(c5224.45,12618.19) U1.12@5224.45,12558.98 ; 5182.58,12576.32 cw(c5140.71,12534.45) U1.12@5199.92,12534.45 ; 5182.58,12576.32 ccw(c5224.45,12618.19) U1.12@5224.45,12558.98 ; 5182.58,12576.32 cw(c5140.71,12534.45) U1.12@5199.92,12534.45 ; 5193.93,12556.8 ccw(c5231.06,12566.75) U1.12@5223.35,12529.09 ; 5193.93,12556.8 ccw(c5231.06,12566.75) U1.12@5223.35,12529.09 ; 5193.93,12556.8 ccw(c5231.06,12566.75) U1.12@5223.35,12529.09 ; 5193.93,12556.8 ccw(c5231.06,12566.75) U1.12@5223.35,12529.09 ; 5193.93,12556.8 ccw(c5231.06,12566.75) U1.12@5223.35,12529.09 ; 5193.93,12556.8 ccw(c5231.06,12566.75) U1.12@5223.35,12529.09 ; 5193.93,12556.8 ccw(c5231.06,12566.75) U1.12@5223.35,12529.09 ; 5193.93,12556.8 ccw(c5231.06,12566.75) U1.12@5223.35,12529.09 ; 5193.93,12556.8 ccw(c5231.06,12566.75) U1.12@5223.35,12529.09 ; 5193.93,12556.8 ccw(c5231.06,12566.75) U1.12@5223.35,12529.09 ; 5193.93,12556.8 ccw(c5231.06,12566.75) U1.12@5223.35,12529.09 ; 5193.93,12556.8 ccw(c5231.06,12566.75) U1.12@5223.35,12529.09 ; 5193.93,12556.8 ccw(c5231.06,12566.75) U1.12@5223.35,12529.09 ; 5193.93,12556.8 ccw(c5231.06,12566.75) U1.12@5223.35,12529.09 ; 5193.93,12556.8 ccw(c5231.06,12566.75) U1.12@5223.35,12529.09 ; 5199.65,12559.25 cw(c5174.85,12534.45) U1.12@5209.92,12534.45 ; 5199.65,12559.25 ccw(c5224.45,12584.05) U1.12@5224.45,12548.98 ; 5199.65,12559.25 ccw(c5224.45,12584.05) U1.12@5224.45,12548.98 ; 5199.65,12559.25 cw(c5174.85,12534.45) U1.12@5209.92,12534.45 ; 5199.65,12559.25 ccw(c5224.45,12584.05) U1.12@5224.45,12548.98 ; 5199.65,12559.25 cw(c5174.85,12534.45) U1.12@5209.92,12534.45 ; 5199.65,12559.25 ccw(c5224.45,12584.05) U1.12@5224.45,12548.98 ; 5199.65,12559.25 cw(c5174.85,12534.45) U1.12@5209.92,12534.45 ; 5199.65,12559.25 ccw(c5224.45,12584.05) U1.12@5224.45,12548.98 ; 5199.65,12559.25 cw(c5174.85,12534.45) U1.12@5209.92,12534.45 ; 5199.65,12559.25 ccw(c5224.45,12584.05) U1.12@5224.45,12548.98 ; 5199.65,12559.25 cw(c5174.85,12534.45) U1.12@5209.92,12534.45 ; 5202.1,12564.96 cw(c5192.15,12527.84) U1.12@5229.81,12535.55 ; 5202.1,12564.96 cw(c5192.15,12527.84) U1.12@5229.81,12535.55 ; 5202.1,12564.96 cw(c5192.15,12527.84) U1.12@5229.81,12535.55 ; 5202.1,12564.96 cw(c5192.15,12527.84) U1.12@5229.81,12535.55 ; 5202.1,12564.96 cw(c5192.15,12527.84) U1.12@5229.81,12535.55 ; 5202.1,12564.96 cw(c5192.15,12527.84) U1.12@5229.81,12535.55 ; 5202.1,12564.96 cw(c5192.15,12527.84) U1.12@5229.81,12535.55 ; 5202.1,12564.96 cw(c5192.15,12527.84) U1.12@5229.81,12535.55 ; 5202.1,12564.96 cw(c5192.15,12527.84) U1.12@5229.81,12535.55 ; 5202.1,12564.96 cw(c5192.15,12527.84) U1.12@5229.81,12535.55 ; 5202.1,12564.96 cw(c5192.15,12527.84) U1.12@5229.81,12535.55 ; 5202.1,12564.96 cw(c5192.15,12527.84) U1.12@5229.81,12535.55 ; 5202.1,12564.96 cw(c5192.15,12527.84) U1.12@5229.81,12535.55 ; 5202.1,12564.96 cw(c5192.15,12527.84) U1.12@5229.81,12535.55 ; 5202.1,12564.96 cw(c5192.15,12527.84) U1.12@5229.81,12535.55
  Bottom Layer w10: NRF24L01.3@4816.57,13591.93 4816.57,13472.24 4866.18,13422.64 4866.18,12892.72 v1(5019.72,12739.17) ; NRF24L01.3@4799.23,13574.59 cw(c4757.36,13532.71) 4816.57,13532.71 ; NRF24L01.3@4799.23,13574.59 cw(c4757.36,13532.71) 4816.57,13532.71 ; NRF24L01.3@4799.23,13574.59 cw(c4757.36,13532.71) 4816.57,13532.71 ; NRF24L01.3@4799.23,13574.59 cw(c4757.36,13532.71) 4816.57,13532.71 ; NRF24L01.3@4799.23,13574.59 cw(c4757.36,13532.71) 4816.57,13532.71 ; NRF24L01.3@4799.23,13574.59 cw(c4757.36,13532.71) 4816.57,13532.71 ; NRF24L01.3@4806.3,13581.66 cw(c4781.5,13556.86) 4816.57,13556.86 ; NRF24L01.3@4806.3,13581.66 cw(c4781.5,13556.86) 4816.57,13556.86 ; NRF24L01.3@4806.3,13581.66 cw(c4781.5,13556.86) 4816.57,13556.86 ; NRF24L01.3@4806.3,13581.66 cw(c4781.5,13556.86) 4816.57,13556.86 ; NRF24L01.3@4806.3,13581.66 cw(c4781.5,13556.86) 4816.57,13556.86 ; NRF24L01.3@4806.3,13581.66 cw(c4781.5,13556.86) 4816.57,13556.86 ; 4816.57,13532.71 cw(c4875.79,13532.71) NRF24L01.3@4833.92,13574.59 ; 4816.57,13532.71 cw(c4875.79,13532.71) NRF24L01.3@4833.92,13574.59 ; 4816.57,13532.71 cw(c4875.79,13532.71) NRF24L01.3@4833.92,13574.59 ; 4816.57,13532.71 cw(c4875.79,13532.71) NRF24L01.3@4833.92,13574.59 ; 4816.57,13532.71 cw(c4875.79,13532.71) NRF24L01.3@4833.92,13574.59 ; 4816.57,13532.71 cw(c4875.79,13532.71) NRF24L01.3@4833.92,13574.59 ; 4816.57,13556.86 cw(c4851.65,13556.86) NRF24L01.3@4826.85,13581.66 ; 4816.57,13556.86 cw(c4851.65,13556.86) NRF24L01.3@4826.85,13581.66 ; 4816.57,13556.86 cw(c4851.65,13556.86) NRF24L01.3@4826.85,13581.66 ; 4816.57,13556.86 cw(c4851.65,13556.86) NRF24L01.3@4826.85,13581.66 ; 4816.57,13556.86 cw(c4851.65,13556.86) NRF24L01.3@4826.85,13581.66 ; 4816.57,13556.86 cw(c4851.65,13556.86) NRF24L01.3@4826.85,13581.66 ; 4985.58,12773.32 cw(c4951.44,12739.17) v1@4999.72,12739.17 ; 4985.58,12773.32 ccw(c5019.72,12807.46) v1@5019.72,12759.17 ; 4985.58,12773.32 ccw(c5019.72,12807.46) v1@5019.72,12759.17 ; 4985.58,12773.32 cw(c4951.44,12739.17) v1@4999.72,12739.17 ; 4985.58,12773.32 ccw(c5019.72,12807.46) v1@5019.72,12759.17 ; 4985.58,12773.32 cw(c4951.44,12739.17) v1@4999.72,12739.17 ; 4985.58,12773.32 ccw(c5019.72,12807.46) v1@5019.72,12759.17 ; 4985.58,12773.32 cw(c4951.44,12739.17) v1@4999.72,12739.17 ; 4985.58,12773.32 ccw(c5019.72,12807.46) v1@5019.72,12759.17 ; 4985.58,12773.32 cw(c4951.44,12739.17) v1@4999.72,12739.17 ; 4985.58,12773.32 ccw(c5019.72,12807.46) v1@5019.72,12759.17 ; 4985.58,12773.32 cw(c4951.44,12739.17) v1@4999.72,12739.17 ; 4992.97,12764.37 ccw(c5026.74,12773.42) v1(5019.72,12739.17) ; 4992.97,12764.37 ccw(c5026.74,12773.42) v1(5019.72,12739.17) ; 4992.97,12764.37 ccw(c5026.74,12773.42) v1(5019.72,12739.17) ; 4992.97,12764.37 ccw(c5026.74,12773.42) v1(5019.72,12739.17) ; 4992.97,12764.37 ccw(c5026.74,12773.42) v1(5019.72,12739.17) ; 4992.97,12764.37 ccw(c5026.74,12773.42) v1(5019.72,12739.17) ; 4992.97,12764.37 ccw(c5026.74,12773.42) v1(5019.72,12739.17) ; 4992.97,12764.37 ccw(c5026.74,12773.42) v1(5019.72,12739.17) ; 4992.97,12764.37 ccw(c5026.74,12773.42) v1(5019.72,12739.17) ; 4992.97,12764.37 ccw(c5026.74,12773.42) v1(5019.72,12739.17) ; 4992.97,12764.37 ccw(c5026.74,12773.42) v1(5019.72,12739.17) ; 4992.97,12764.37 ccw(c5026.74,12773.42) v1(5019.72,12739.17) ; 4992.97,12764.37 ccw(c5026.74,12773.42) v1(5019.72,12739.17) ; 4992.97,12764.37 ccw(c5026.74,12773.42) v1(5019.72,12739.17) ; 4992.97,12764.37 ccw(c5026.74,12773.42) v1(5019.72,12739.17) ; 4994.53,12765.93 cw(c4985.48,12732.16) v1(5019.72,12739.17) ; 4994.53,12765.93 cw(c4985.48,12732.16) v1(5019.72,12739.17) ; 4994.53,12765.93 cw(c4985.48,12732.16) v1(5019.72,12739.17) ; 4994.53,12765.93 cw(c4985.48,12732.16) v1(5019.72,12739.17) ; 4994.53,12765.93 cw(c4985.48,12732.16) v1(5019.72,12739.17) ; 4994.53,12765.93 cw(c4985.48,12732.16) v1(5019.72,12739.17) ; 4994.53,12765.93 cw(c4985.48,12732.16) v1(5019.72,12739.17) ; 4994.53,12765.93 cw(c4985.48,12732.16) v1(5019.72,12739.17) ; 4994.53,12765.93 cw(c4985.48,12732.16) v1(5019.72,12739.17) ; 4994.53,12765.93 cw(c4985.48,12732.16) v1(5019.72,12739.17) ; 4994.53,12765.93 cw(c4985.48,12732.16) v1(5019.72,12739.17) ; 4994.53,12765.93 cw(c4985.48,12732.16) v1(5019.72,12739.17) ; 4994.53,12765.93 cw(c4985.48,12732.16) v1(5019.72,12739.17) ; 4994.53,12765.93 cw(c4985.48,12732.16) v1(5019.72,12739.17) ; 4994.53,12765.93 cw(c4985.48,12732.16) v1(5019.72,12739.17)
PA15: U1.11
PB0: P3.1 U2.13 | length 4222.4
  Top Layer w10: P3.1@4913.43,12932.8 4913.43,12745.47 4976.42,12682.48 4976.42,12282.48 U2.13@5324.45,11934.45 ; P3.1@4896.08,12915.45 cw(c4854.21,12873.58) 4913.43,12873.58 ; P3.1@4896.08,12915.45 cw(c4854.21,12873.58) 4913.43,12873.58 ; P3.1@4896.08,12915.45 cw(c4854.21,12873.58) 4913.43,12873.58 ; P3.1@4896.08,12915.45 cw(c4854.21,12873.58) 4913.43,12873.58 ; P3.1@4896.08,12915.45 cw(c4854.21,12873.58) 4913.43,12873.58 ; P3.1@4896.08,12915.45 cw(c4854.21,12873.58) 4913.43,12873.58 ; P3.1@4903.15,12922.52 cw(c4878.35,12897.72) 4913.43,12897.72 ; P3.1@4903.15,12922.52 cw(c4878.35,12897.72) 4913.43,12897.72 ; P3.1@4903.15,12922.52 cw(c4878.35,12897.72) 4913.43,12897.72 ; P3.1@4903.15,12922.52 cw(c4878.35,12897.72) 4913.43,12897.72 ; P3.1@4903.15,12922.52 cw(c4878.35,12897.72) 4913.43,12897.72 ; P3.1@4903.15,12922.52 cw(c4878.35,12897.72) 4913.43,12897.72 ; 4913.43,12873.58 cw(c4972.64,12873.58) P3.1@4930.77,12915.45 ; 4913.43,12873.58 cw(c4972.64,12873.58) P3.1@4930.77,12915.45 ; 4913.43,12873.58 cw(c4972.64,12873.58) P3.1@4930.77,12915.45 ; 4913.43,12873.58 cw(c4972.64,12873.58) P3.1@4930.77,12915.45 ; 4913.43,12873.58 cw(c4972.64,12873.58) P3.1@4930.77,12915.45 ; 4913.43,12873.58 cw(c4972.64,12873.58) P3.1@4930.77,12915.45 ; 4913.43,12897.72 cw(c4948.5,12897.72) P3.1@4923.7,12922.52 ; 4913.43,12897.72 cw(c4948.5,12897.72) P3.1@4923.7,12922.52 ; 4913.43,12897.72 cw(c4948.5,12897.72) P3.1@4923.7,12922.52 ; 4913.43,12897.72 cw(c4948.5,12897.72) P3.1@4923.7,12922.52 ; 4913.43,12897.72 cw(c4948.5,12897.72) P3.1@4923.7,12922.52 ; 4913.43,12897.72 cw(c4948.5,12897.72) P3.1@4923.7,12922.52 ; 5282.58,11976.32 cw(c5240.71,11934.45) U2.13@5299.92,11934.45 ; 5282.58,11976.32 ccw(c5324.45,12018.19) U2.13@5324.45,11958.98 ; 5282.58,11976.32 ccw(c5324.45,12018.19) U2.13@5324.45,11958.98 ; 5282.58,11976.32 cw(c5240.71,11934.45) U2.13@5299.92,11934.45 ; 5282.58,11976.32 ccw(c5324.45,12018.19) U2.13@5324.45,11958.98 ; 5282.58,11976.32 cw(c5240.71,11934.45) U2.13@5299.92,11934.45 ; 5282.58,11976.32 ccw(c5324.45,12018.19) U2.13@5324.45,11958.98 ; 5282.58,11976.32 cw(c5240.71,11934.45) U2.13@5299.92,11934.45 ; 5282.58,11976.32 ccw(c5324.45,12018.19) U2.13@5324.45,11958.98 ; 5282.58,11976.32 cw(c5240.71,11934.45) U2.13@5299.92,11934.45 ; 5282.58,11976.32 ccw(c5324.45,12018.19) U2.13@5324.45,11958.98 ; 5282.58,11976.32 cw(c5240.71,11934.45) U2.13@5299.92,11934.45 ; 5293.93,11956.8 ccw(c5331.06,11966.75) U2.13@5323.35,11929.09 ; 5293.93,11956.8 ccw(c5331.06,11966.75) U2.13@5323.35,11929.09 ; 5293.93,11956.8 ccw(c5331.06,11966.75) U2.13@5323.35,11929.09 ; 5293.93,11956.8 ccw(c5331.06,11966.75) U2.13@5323.35,11929.09 ; 5293.93,11956.8 ccw(c5331.06,11966.75) U2.13@5323.35,11929.09 ; 5293.93,11956.8 ccw(c5331.06,11966.75) U2.13@5323.35,11929.09 ; 5293.93,11956.8 ccw(c5331.06,11966.75) U2.13@5323.35,11929.09 ; 5293.93,11956.8 ccw(c5331.06,11966.75) U2.13@5323.35,11929.09 ; 5293.93,11956.8 ccw(c5331.06,11966.75) U2.13@5323.35,11929.09 ; 5293.93,11956.8 ccw(c5331.06,11966.75) U2.13@5323.35,11929.09 ; 5293.93,11956.8 ccw(c5331.06,11966.75) U2.13@5323.35,11929.09 ; 5293.93,11956.8 ccw(c5331.06,11966.75) U2.13@5323.35,11929.09 ; 5293.93,11956.8 ccw(c5331.06,11966.75) U2.13@5323.35,11929.09 ; 5293.93,11956.8 ccw(c5331.06,11966.75) U2.13@5323.35,11929.09 ; 5293.93,11956.8 ccw(c5331.06,11966.75) U2.13@5323.35,11929.09 ; 5299.65,11959.25 cw(c5274.85,11934.45) U2.13@5309.92,11934.45 ; 5299.65,11959.25 ccw(c5324.45,11984.05) U2.13@5324.45,11948.98 ; 5299.65,11959.25 ccw(c5324.45,11984.05) U2.13@5324.45,11948.98 ; 5299.65,11959.25 cw(c5274.85,11934.45) U2.13@5309.92,11934.45 ; 5299.65,11959.25 ccw(c5324.45,11984.05) U2.13@5324.45,11948.98 ; 5299.65,11959.25 cw(c5274.85,11934.45) U2.13@5309.92,11934.45 ; 5299.65,11959.25 ccw(c5324.45,11984.05) U2.13@5324.45,11948.98 ; 5299.65,11959.25 cw(c5274.85,11934.45) U2.13@5309.92,11934.45 ; 5299.65,11959.25 ccw(c5324.45,11984.05) U2.13@5324.45,11948.98 ; 5299.65,11959.25 cw(c5274.85,11934.45) U2.13@5309.92,11934.45 ; 5299.65,11959.25 ccw(c5324.45,11984.05) U2.13@5324.45,11948.98 ; 5299.65,11959.25 cw(c5274.85,11934.45) U2.13@5309.92,11934.45 ; 5302.1,11964.96 cw(c5292.15,11927.84) U2.13@5329.81,11935.55 ; 5302.1,11964.96 cw(c5292.15,11927.84) U2.13@5329.81,11935.55 ; 5302.1,11964.96 cw(c5292.15,11927.84) U2.13@5329.81,11935.55 ; 5302.1,11964.96 cw(c5292.15,11927.84) U2.13@5329.81,11935.55 ; 5302.1,11964.96 cw(c5292.15,11927.84) U2.13@5329.81,11935.55 ; 5302.1,11964.96 cw(c5292.15,11927.84) U2.13@5329.81,11935.55 ; 5302.1,11964.96 cw(c5292.15,11927.84) U2.13@5329.81,11935.55 ; 5302.1,11964.96 cw(c5292.15,11927.84) U2.13@5329.81,11935.55 ; 5302.1,11964.96 cw(c5292.15,11927.84) U2.13@5329.81,11935.55 ; 5302.1,11964.96 cw(c5292.15,11927.84) U2.13@5329.81,11935.55 ; 5302.1,11964.96 cw(c5292.15,11927.84) U2.13@5329.81,11935.55 ; 5302.1,11964.96 cw(c5292.15,11927.84) U2.13@5329.81,11935.55 ; 5302.1,11964.96 cw(c5292.15,11927.84) U2.13@5329.81,11935.55 ; 5302.1,11964.96 cw(c5292.15,11927.84) U2.13@5329.81,11935.55 ; 5302.1,11964.96 cw(c5292.15,11927.84) U2.13@5329.81,11935.55
PB1: P4.1 U2.14 | length 3003.5
  Top Layer w10: P4.1@5013.43,12932.8 5013.43,12838.39 5082.72,12769.09 5181.14,12769.09 5271.69,12678.54 5271.69,12343.9 5424.45,12191.14 U2.14@5424.45,11934.45 ; P4.1@4996.08,12915.45 cw(c4954.21,12873.58) 5013.43,12873.58 ; P4.1@4996.08,12915.45 cw(c4954.21,12873.58) 5013.43,12873.58 ; P4.1@4996.08,12915.45 cw(c4954.21,12873.58) 5013.43,12873.58 ; P4.1@4996.08,12915.45 cw(c4954.21,12873.58) 5013.43,12873.58 ; P4.1@4996.08,12915.45 cw(c4954.21,12873.58) 5013.43,12873.58 ; P4.1@4996.08,12915.45 cw(c4954.21,12873.58) 5013.43,12873.58 ; P4.1@5003.15,12922.52 cw(c4978.35,12897.72) 5013.43,12897.72 ; P4.1@5003.15,12922.52 cw(c4978.35,12897.72) 5013.43,12897.72 ; P4.1@5003.15,12922.52 cw(c4978.35,12897.72) 5013.43,12897.72 ; P4.1@5003.15,12922.52 cw(c4978.35,12897.72) 5013.43,12897.72 ; P4.1@5003.15,12922.52 cw(c4978.35,12897.72) 5013.43,12897.72 ; P4.1@5003.15,12922.52 cw(c4978.35,12897.72) 5013.43,12897.72 ; 5013.43,12873.58 cw(c5072.64,12873.58) P4.1@5030.77,12915.45 ; 5013.43,12873.58 cw(c5072.64,12873.58) P4.1@5030.77,12915.45 ; 5013.43,12873.58 cw(c5072.64,12873.58) P4.1@5030.77,12915.45 ; 5013.43,12873.58 cw(c5072.64,12873.58) P4.1@5030.77,12915.45 ; 5013.43,12873.58 cw(c5072.64,12873.58) P4.1@5030.77,12915.45 ; 5013.43,12873.58 cw(c5072.64,12873.58) P4.1@5030.77,12915.45 ; 5013.43,12897.72 cw(c5048.5,12897.72) P4.1@5023.7,12922.52 ; 5013.43,12897.72 cw(c5048.5,12897.72) P4.1@5023.7,12922.52 ; 5013.43,12897.72 cw(c5048.5,12897.72) P4.1@5023.7,12922.52 ; 5013.43,12897.72 cw(c5048.5,12897.72) P4.1@5023.7,12922.52 ; 5013.43,12897.72 cw(c5048.5,12897.72) P4.1@5023.7,12922.52 ; 5013.43,12897.72 cw(c5048.5,12897.72) P4.1@5023.7,12922.52 ; U2.14@5407.11,11951.79 ccw(c5365.23,11993.66) 5424.45,11993.66 ; U2.14@5407.11,11951.79 ccw(c5365.23,11993.66) 5424.45,11993.66 ; U2.14@5407.11,11951.79 ccw(c5365.23,11993.66) 5424.45,11993.66 ; U2.14@5407.11,11951.79 ccw(c5365.23,11993.66) 5424.45,11993.66 ; U2.14@5407.11,11951.79 ccw(c5365.23,11993.66) 5424.45,11993.66 ; U2.14@5407.11,11951.79 ccw(c5365.23,11993.66) 5424.45,11993.66 ; U2.14@5414.18,11944.72 ccw(c5389.38,11969.52) 5424.45,11969.52 ; U2.14@5414.18,11944.72 ccw(c5389.38,11969.52) 5424.45,11969.52 ; U2.14@5414.18,11944.72 ccw(c5389.38,11969.52) 5424.45,11969.52 ; U2.14@5414.18,11944.72 ccw(c5389.38,11969.52) 5424.45,11969.52 ; U2.14@5414.18,11944.72 ccw(c5389.38,11969.52) 5424.45,11969.52 ; U2.14@5414.18,11944.72 ccw(c5389.38,11969.52) 5424.45,11969.52 ; 5424.45,11969.52 ccw(c5459.52,11969.52) U2.14@5434.72,11944.72 ; 5424.45,11969.52 ccw(c5459.52,11969.52) U2.14@5434.72,11944.72 ; 5424.45,11969.52 ccw(c5459.52,11969.52) U2.14@5434.72,11944.72 ; 5424.45,11969.52 ccw(c5459.52,11969.52) U2.14@5434.72,11944.72 ; 5424.45,11969.52 ccw(c5459.52,11969.52) U2.14@5434.72,11944.72 ; 5424.45,11969.52 ccw(c5459.52,11969.52) U2.14@5434.72,11944.72 ; 5424.45,11993.66 ccw(c5483.66,11993.66) U2.14@5441.79,11951.79 ; 5424.45,11993.66 ccw(c5483.66,11993.66) U2.14@5441.79,11951.79 ; 5424.45,11993.66 ccw(c5483.66,11993.66) U2.14@5441.79,11951.79 ; 5424.45,11993.66 ccw(c5483.66,11993.66) U2.14@5441.79,11951.79 ; 5424.45,11993.66 ccw(c5483.66,11993.66) U2.14@5441.79,11951.79 ; 5424.45,11993.66 ccw(c5483.66,11993.66) U2.14@5441.79,11951.79
PB3: U1.10